# Altium PCB Direct FM modulator test.PcbDoc (part 2 of 2)
Units mm, origin at the board's own origin, x right, y up, seen from the top; angles counter-clockwise.
Board outline 52.5 x 20.32 mm, 4 copper layers (Top Layer, Layer 1, Layer 2, Bottom Layer), stack 1.501 mm thick; 46 components, 41 nets, 156 pads, 97 vias.
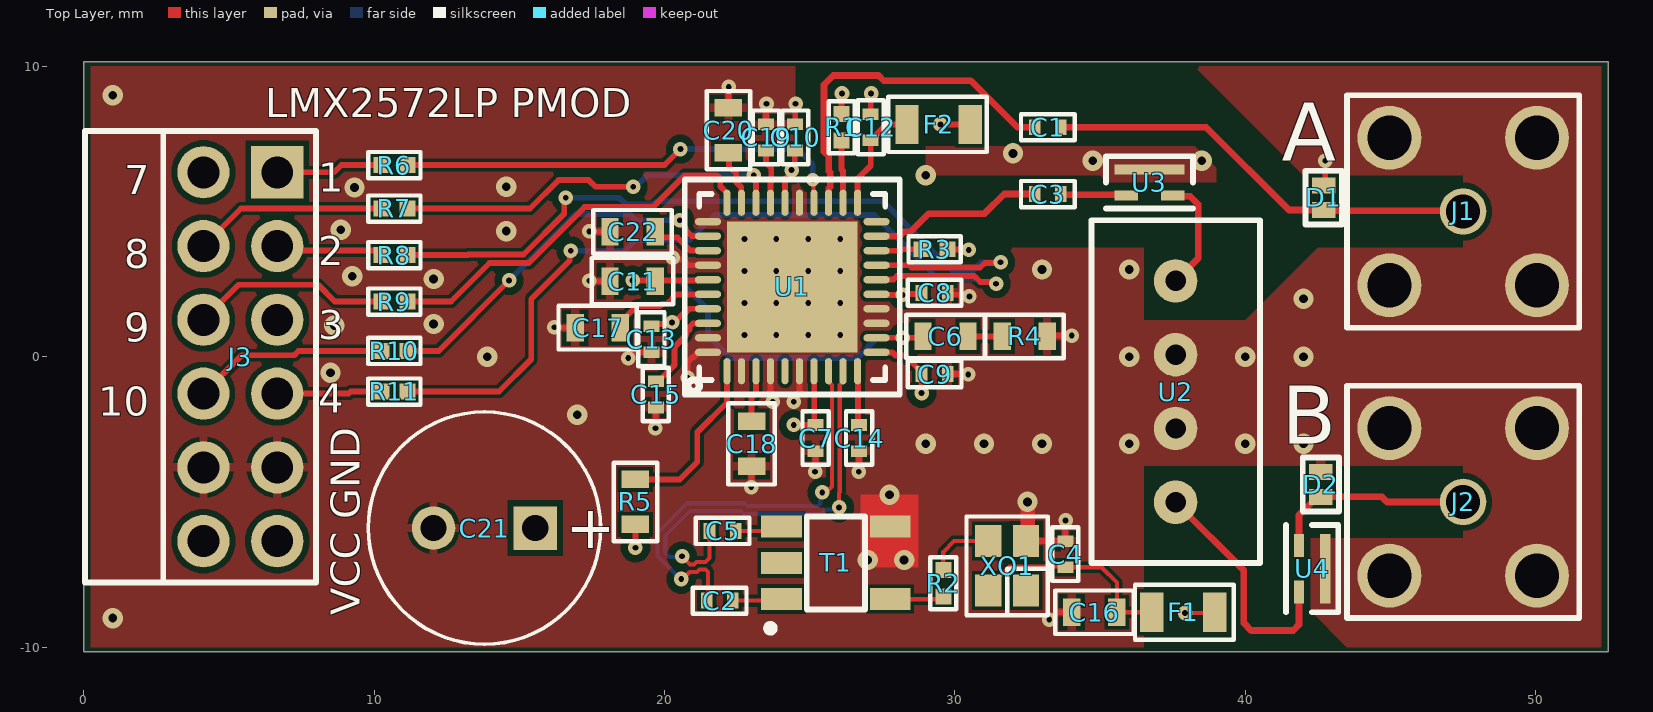
[diagram p0: Top Layer view]

## Via types
v1: diameter 0.5, hole 0.2, Top Layer to Bottom Layer, 63 vias
v2: diameter 0.7, hole 0.3, Top Layer to Bottom Layer, 33 vias
v3: diameter 0.46, hole 0.2, Top Layer to Bottom Layer, 1 vias

## Nets (pads, with @x,y where several pads share a name; then routed paths per layer and width w, separated by ;. In a path a pad name is that pad's centre, name@x,y a point inside that pad or via, vN(x,y) a via of type N, cw(c..) or ccw(c..) an arc to the next point about the centre after c; other vN are vias at no path point)
+3V3: C7.2 C8.2 C9.2 C10.2 C13.2 C21.1 F1.2 F2.1 J3.6 J3.12 R5.2 U1.7 U1.11 U1.15 U1.26 U1.37 | length 13.9
  Top Layer w0.141: v1(37.925,-8.825) 38.925,-8.825 F1.2
  Top Layer w0.2: v1(19,-6.575) R5.2 ; C13.2 19.622,1.122 20.202,1.122 v1(20.26,1.179) v1@20.329,1.179 ; v1@20.26,1.15 20.3,1.15 v1@20.329,1.179 ; U1.37 20.859,1.65 20.696,1.488 20.65,1.488 20.341,1.179 v1@20.329,1.179 ; U1.26 24.15,6.119 24.375,6.344 24.375,6.506 24.487,6.619 24.487,7.088 C10.2 ; v1(24.45,-2.35) C7.2 25.16,-2.31 25.16,-0.51 U1.7 ; U1.11 27.31,0.14 27.855,0.14 27.95,0.046 28.279,0.046 28.85,-0.525 C9.2 v1(28.85,-1.25) ; U1.15 27.639,2.15 27.664,2.125 v1(28.2,2.125) 28.238,2.163 28.813,2.163 C8.2 ; v1(29.5,8) F2.1
  other v1: 24.375,6.425
"+3V3 CLK": C4.2 C16.2 F1.1 XO1.4 | length 7.3
  Top Layer w0.141: XO1.4 31.15,-7.95 31.875,-7.225 33.775,-7.225 C4.2 35.05,-7.25 35.575,-7.775 C16.2 F1.1
CE: R5.1 U1.1 | length 5.9
  Top Layer w0.2: R5.1 20.525,-4.225 21.125,-3.625 21.125,-2.6 22.15,-1.575 U1.1
"CP LOOP": C6.1 C11.2 U1.12 U1.35 | length 15.5
  Top Layer w0.2: v1(18.9,2.625) 19.65,2.625 C11.2 19.7,2.625 21.136,2.625 21.161,2.65 U1.35 ; U1.12 v1(28.2,0.65) 28.85,0.65 C6.1
  Bottom Layer w0.2: v1(18.9,2.625) 20.5,2.625 21.5,1.625 21.5,0.725 22.275,-0.05 26.625,-0.05 27.325,0.65 v1(28.2,0.65)
GND: C4.1 C7.1 C8.1 C9.1 C10.1 C11.1 C12.1 C13.1 C14.1 C15.1 C16.1 C17.1 C18.1 C19.1 C20.1 C21.2 C22.1 D1.2 D2.2 J1.2 J2.2 J3.5 J3.11 R1.2 R3.2 R4.1 T1.4 U1.2 U1.4 U1.6 U1.13 U1.14 U1.25 U1.31 U1.34 U1.39 U1.40 U1.41 U2.2 U2.3 U3.3 U4.3 XO1.2 | length 21.3
  Top Layer w0.2: v1(16.213,1.012) 16.225,1 C17.1 ; v1(17.413,2.612) 17.425,2.6 C11.1 ; v1(17.413,4.312) 17.425,4.3 C22.1 ; v1(18.75,-0.05) 18.806,-0.05 19.006,0.15 C13.1 ; v1(19.687,-2.462) 19.7,-2.45 C15.1 ; v1(20.279,3.407) 20.336,3.349 20.63,3.349 20.829,3.15 U1.34 ; v1(20.8,-0.725) 20.8,-0.175 20.95,-0.025 20.986,-0.025 21.161,0.15 U1.40 ; C20.1 22.2,9.275 v1(22.212,9.287) ; v1(22.988,-4.487) 23,-4.475 C18.1 ; C19.1 v1@23.5,8.7 ; U1.4 23.65,-1.395 23.725,-1.469 v1(23.725,-1.551) ; v1(24.45,-1.55) 24.45,-1.469 24.65,-1.269 U1.6 ; C10.1 v1@24.5,8.7 ; v1(25.188,-3.962) 25.2,-3.95 C7.1 ; R1.2 26.1,9.05 v1(26.113,9.062) ; v1(26.688,-3.962) 26.7,-3.95 C14.1 ; C12.1 27.1,9.05 v1(27.112,9.062) ; C9.1 30.45,-0.6 v1(30.462,-0.612) ; C8.1 29.818,2.132 30.443,2.132 v1(30.5,2.075) ; R3.2 29.763,3.687 30.462,3.687 v1(30.475,3.675) ; XO1.2 C4.1 33.8,-5.65 v1(33.813,-5.638) ; R4.1 33.2,0.725 v1(34.025,0.725) ; v1(33.25,-9.05) 33.256,-9.05 33.506,-8.8 C16.1 ; D1.2 42.75,5.95 v1(42.75,6.75)
  other v1: 22.75,0.75 23.85,0.75 24.95,0.75 26.05,0.75 22.75,1.85 23.85,1.85 24.95,1.85 26.05,1.85 22.75,2.95 23.85,2.95 24.95,2.95 26.05,2.95 22.75,4.05 23.85,4.05 24.95,4.05 26.05,4.05 23.512,8.712 24.512,8.712
  other v2: 1,-9 27,-7 28.25,-7 32.5,-5 27.75,-4.75 29,-3 31,-3 33,-3 36,-3 40,-3 42,-3 17,-2 8.5,-0.55 13.9,0 36,0 40,0 42,0 8.625,1.075 12.05,1.125 42,2 12.05,2.675 9.25,2.775 33,3 36,3 14.55,4.325 8.85,4.375 9.325,5.825 14.55,5.85 29,6.25 34.75,6.75 38.5,6.75 32,7 1,9
"I2S LRCK": R7.1 U1.28 | length 13.6
  Top Layer w0.2: R7.1 15.371,5.1 16.35,6.079 17.393,6.079 17.622,5.85 v1(18.925,5.85) ; v1(23.075,6.25) 23.075,6.169 23.15,6.094 U1.28
  Bottom Layer w0.2: v1(18.925,5.85) 19.006,5.85 19.406,6.25 v1(23.075,6.25)
"I2S SCLK": R9.1 U1.30 | length 13.5
  Top Layer w0.2: R9.1 12.65,1.9 13.979,3.229 15.329,3.229 17.25,5.15 19.6,5.15 20.7,6.25 21.8,6.25 21.917,6.133 21.917,5.871 22.15,5.639 U1.30
"I2S SDIN": R10.1 U1.32 | length 12.7
  Top Layer w0.2: R10.1 12.225,0.2 v1(14.65,2.625) ; v1(20.525,4.7) 20.525,4.619 20.724,4.42 20.724,4.376 20.94,4.16 21.49,4.16 U1.32
  Bottom Layer w0.2: v1(14.65,2.625) 16.941,4.916 18.801,4.916 19.018,4.7 v1(20.525,4.7)
NetC2_1: C2.1 T1.1 | length 1.7
  Top Layer w0.141: C2.1 23.98,-8.4 T1.1
NetC5_1: C5.1 T1.3 | length 1.6
  Top Layer w0.141: C5.1 23.88,-6 T1.3
NetC6_2: C6.2 R4.2 | length 1.2
  Top Layer w0.2: C6.2 R4.2
NetC12_2: C12.2 F2.2 U1.21 | length 3.9
  Top Layer w0.2: U1.21 26.65,6.125 27.1,6.575 C12.2 27.175,7.45 27.275,7.55 27.275,7.625 27.65,8 F2.2
NetD2_1: D2.1 J2.1 U4.2 | length 7
  Top Layer w0.23: U4.2 41.85,-5.45 42.475,-4.825 D2.1 44.709,-4.825 44.884,-5 J2.1
NetJ3_1: J3.1 R6.1 | length 3.7
  Top Layer w0.2: J3.1 8.625,6.35 8.875,6.6 R6.1
NetJ3_2: J3.2 R8.1 | length 3.7
  Top Layer w0.2: J3.2 6.822,3.655 10.095,3.655 R8.1
NetJ3_4: J3.4 R11.1 | length 3.6
  Top Layer w0.2: J3.4 9.13,-1.27 9.2,-1.2 R11.1
NetJ3_8: J3.8 R7.2 | length 6.7
  Top Layer w0.2: J3.8 5.417,5.1 R7.2
NetJ3_9: J3.9 R9.2 | length 6.9
  Top Layer w0.2: J3.9 5.332,2.475 8.075,2.475 8.65,1.9 R9.2
NetJ3_10: J3.10 R10.2 | length 6.7
  Top Layer w0.2: J3.10 5.447,0.05 7.25,0.05 7.4,0.2 R10.2
NetR2_1: R2.1 XO1.3 | length 2.3
  Top Layer w0.141: R2.1 29.6,-6.725 29.975,-6.35 XO1.3
NetR2_2: R2.2 T1.5 | length 1.9
  Top Layer w0.141: T1.5 29.5,-8.35 R2.2
NetU2_1: U2.1 U3.1 | length 4
  Top Layer w0.23: U3.1 37.525,5.525 38.1,5.525 38.375,5.25 38.375,3.385 U2.1
NetU2_4: U2.4 U4.1 | length 8.3
  Top Layer w0.23: U2.4 39.95,-7.36 39.95,-9.175 40.2,-9.425 41.65,-9.425 41.85,-9.225 U4.1
"OSC IN_N": C5.2 U1.9 | length 14.5
  Top Layer w0.141: v1(20.604,-6.871) 20.884,-7.15 21.012,-7.15 21.096,-7.066 21.417,-7.066 21.55,-6.933 C5.2 ; v1(26.014,-5.189) 26.008,-5.183 26.008,-4.687 26.034,-4.661 26.034,-0.97 26.15,-0.854 U1.9
  Bottom Layer w0.141: v1(20.604,-6.871) 20.575,-6.9 20.175,-6.9 20.025,-6.75 20.025,-6.175 20.885,-5.315 22.635,-5.315 22.735,-5.414 25.393,-5.414 25.535,-5.272 25.574,-5.272 25.588,-5.258 25.945,-5.258 v1(26.014,-5.189)
"OSC IN_P": C2.2 U1.8 | length 15
  Top Layer w0.141: v1(20.575,-7.654) 20.633,-7.654 20.869,-7.418 21.123,-7.418 21.207,-7.334 21.417,-7.334 21.5,-7.417 21.5,-8.35 C2.2 ; v1(25.434,-4.675) 25.531,-4.675 25.652,-4.554 25.683,-4.554 25.766,-4.472 25.766,-0.97 25.65,-0.854 U1.8
  Bottom Layer w0.141: v1(20.575,-7.654) 20.55,-7.654 19.757,-6.861 19.757,-6.064 20.774,-5.046 22.746,-5.046 22.846,-5.146 25.282,-5.146 25.365,-5.063 25.365,-4.744 v1(25.434,-4.675)
"RF OUT A": C1.2 D1.1 J1.1 | length 15.1
  Top Layer w0.23: C1.2 38.651,7.9 41.501,5.05 D1.1 42.725,5.025 47.475,5.025 J1.1
"RF OUT A_N": R1.1 U1.22 | length 2.2
  Top Layer w0.2: R1.1 26.1,6.45 26.15,6.4 U1.22
"RF OUT A_P": C1.1 U1.23 | length 12.3
  Top Layer w0.23: U1.23 25.654,5.304 25.654,5.791 25.707,5.844 25.707,6.34 25.654,6.393 25.654,6.901 25.494,7.061 25.494,9.364 25.811,9.681 27.369,9.681 27.55,9.5 30.55,9.5 32.15,7.9 C1.1
"RF OUT B": C3.2 U3.2 | length 2.3
  Top Layer w0.23: C3.2 33.675,5.575 35.875,5.575 U3.2
"RF OUT B_N": R3.1 U1.18 | length 1.6
  Top Layer w0.2: U1.18 28.125,3.65 28.175,3.7 R3.1
"RF OUT B_P": C3.1 U1.19 | length 6.1
  Top Layer w0.23: U1.19 28.095,4.15 28.245,4.3 28.475,4.3 29.1,4.925 31.025,4.925 31.7,5.6 C3.1
"SPI CS": R6.2 U1.24 | length 15.7
  Top Layer w0.15: v3(25.108,6.092) 25.131,6.069 25.131,5.319 U1.24
  Top Layer w0.2: R6.2 20,6.6 v1(20.55,7.15)
  Bottom Layer w0.2: v1(20.55,7.15) 24.575,7.15 24.721,7.004 24.725,7.004 25.079,6.65 25.079,6.646 25.108,6.617 v3(25.108,6.092)
"SPI MOSI": R8.2 U1.17 | length 27.2
  Top Layer w0.2: R8.2 13.225,3.5 13.243,3.518 15.143,3.518 16.55,4.925 16.55,5.425 v1(16.6,5.475) ; U1.17 28.426,3.15 28.505,3.071 30.867,3.071 31.025,3.229 31.554,3.229 v1(31.575,3.25)
  Bottom Layer w0.2: v1(16.6,5.475) 18.446,5.475 18.675,5.246 19.624,5.246 19.728,5.35 27.525,5.35 29.907,2.968 30.622,2.968 30.904,3.25 v1(31.575,3.25)
"SPI SCLK": R11.2 U1.16 | length 29.4
  Top Layer w0.2: R11.2 14.3,-1.2 15.412,-0.088 15.412,1.987 16.736,3.311 16.736,3.611 v1(16.775,3.65) ; U1.16 27.31,2.66 27.88,2.66 28.003,2.782 30.666,2.782 30.878,2.57 31.36,2.57 v1(31.417,2.513)
  Bottom Layer w0.2: v1(16.775,3.65) 18.637,3.65 18.998,4.011 20.861,4.011 21.725,4.875 27.225,4.875 29.421,2.679 30.75,2.679 30.867,2.562 31.368,2.562 v1(31.417,2.513)
"V BIAS VARAC": C22.2 U1.33 | length 2.1
  Top Layer w0.2: C22.2 19.875,4.1 20.45,4.1 20.89,3.66 21.49,3.66 U1.33
"V BIAS VCO": C18.2 U1.3 | length 1.8
  Top Layer w0.2: C18.2 23,-1.4 23.15,-1.25 U1.3
"V BIAS VCO2": C19.2 U1.27 | length 1.9
  Top Layer w0.2: C19.2 23.5,6.679 23.679,6.5 23.679,6 23.65,5.971 U1.27
"V REF VCO": C17.2 U1.36 | length 3.6
  Top Layer w0.2: C17.2 18.475,1.175 19.05,1.75 19.85,1.75 19.925,1.825 20.099,1.825 20.275,2.001 20.275,2.023 20.392,2.14 21.49,2.14 U1.36
"V REF VCO2": C20.2 U1.29 | length 1.9
  Top Layer w0.2: C20.2 22.225,7 22.225,6.55 22.471,6.304 22.471,6 22.64,5.83 22.64,5.31 U1.29
"V REG IN": C14.2 U1.10 | length 1.9
  Top Layer w0.2: U1.10 26.66,-0.51 26.66,-2.31 C14.2
"V REG VCO": C15.2 U1.38 | length 3.1
  Top Layer w0.2: C15.2 19.775,-0.85 20.35,-0.275 20.35,0.346 20.75,0.746 20.75,0.826 20.864,0.94 20.864,1.023 20.981,1.14 21.49,1.14 U1.38
pads on no net: J3.3 J3.7 T1.2 U1.5 U1.20 XO1.1

## Polygon pours and split planes (outlines as drawn)
GND on Top Layer "GND_L01_P004" (solid, remove dead copper, pour order 4): 36.5,-10 36.5,3.75 24.5,3.75 24.5,10 0.25,10 0.25,-10
GND on Top Layer "GND_L01_P002" (solid, remove dead copper, pour order 2): 20.75,-1.25 28,-1.25 28,6 20.75,6
GND on Top Layer "GND_L01_P005" (solid, remove dead copper, pour order 5): 39,6 39,6.5 38.25,7.25 29,7.25 29,6.25 35,6.25 35.25,6
GND on Top Layer "GND_L01_P003" (solid, remove dead copper, pour order 3): 42.25,-6.25 47.5,-6.25 47.5,-5 47.5,-3.75 35.25,-3.75 35.25,1.25 40,1.25 42.5,3.75 47.5,3.75 47.5,5 47.5,6.25 42,6.25 38.25,10 52.25,10 52.25,-10 43.5,-10 42.25,-8.75
+3V3 on Layer 2 "+3V3_L03_P000" (solid, remove dead copper, pour order 0): 0.508,-10.033 cw(c0.508,-9.652) 0.127,-9.652 0.127,9.652 cw(c0.508,9.652) 0.508,10.033 51.943,10.033 cw(c51.943,9.652) 52.324,9.652 52.324,-9.652 cw(c51.943,-9.652) 51.943,-10.033
GND on Layer 1 "GND_L02_P001" (solid, remove dead copper, pour order 1): 0.508,-10.033 cw(c0.508,-9.652) 0.127,-9.652 0.127,9.652 cw(c0.508,9.652) 0.508,10.033 51.943,10.033 cw(c51.943,9.652) 52.324,9.652 52.324,-9.652 cw(c51.943,-9.652) 51.943,-10.033
GND on Bottom Layer "GND_L04_P006" (solid, remove dead copper, pour order 6): 52.25,-10 52.25,10 0.25,10 0.25,-10

## Other copper
Top Layer:
  rectangle net GND: 32.25,-6.25 32.75,-4.75
  rectangle net GND: 26.75,-7.25 28.75,-4.75

## Silkscreen, mask and mechanical layers (free items; w line width, h text height)
Top Overlay:
  lines w0.2: 43.5,-9 43.5,-1 50.75,-1 51.5,-1 51.5,-7.25 51.5,-9 43.5,-9 ; 43.5,1 51.5,1 51.5,2.75 51.5,9 50.75,9 43.5,9 43.5,1
  text "LMX2572LP PMOD" at 6.25,8.25 h1
  text "A" at 41.25,6.75 h2
  text "B" at 41.25,-3 h2
Mechanical 1:
  the board outline again, w0.2

## Text inside footprints (layer, text, board x,y; h text height)
C21: Top Overlay "+" at 16.6,-6.6 h1.5
J3: Top Overlay "9" at 1.397,0.508 h1; Top Overlay "1" at 8.082,5.688 h1; Top Overlay "2" at 8.082,3.148 h1; Top Overlay "8" at 1.397,3.048 h1; Top Overlay "10" at 0.508,-2.032 h1; Top Overlay "7" at 1.397,5.588 h1; Top Overlay "VCC" at 9.5,-8.9 h1 r90; Top Overlay "4" at 8.082,-1.932 h1; Top Overlay "3" at 8.082,0.608 h1; Top Overlay "GND" at 9.5,-5.6 h1 r90